# EAGLE board RedBot_Buzzer-Panel-v10 (EAGLE 6.5.0)
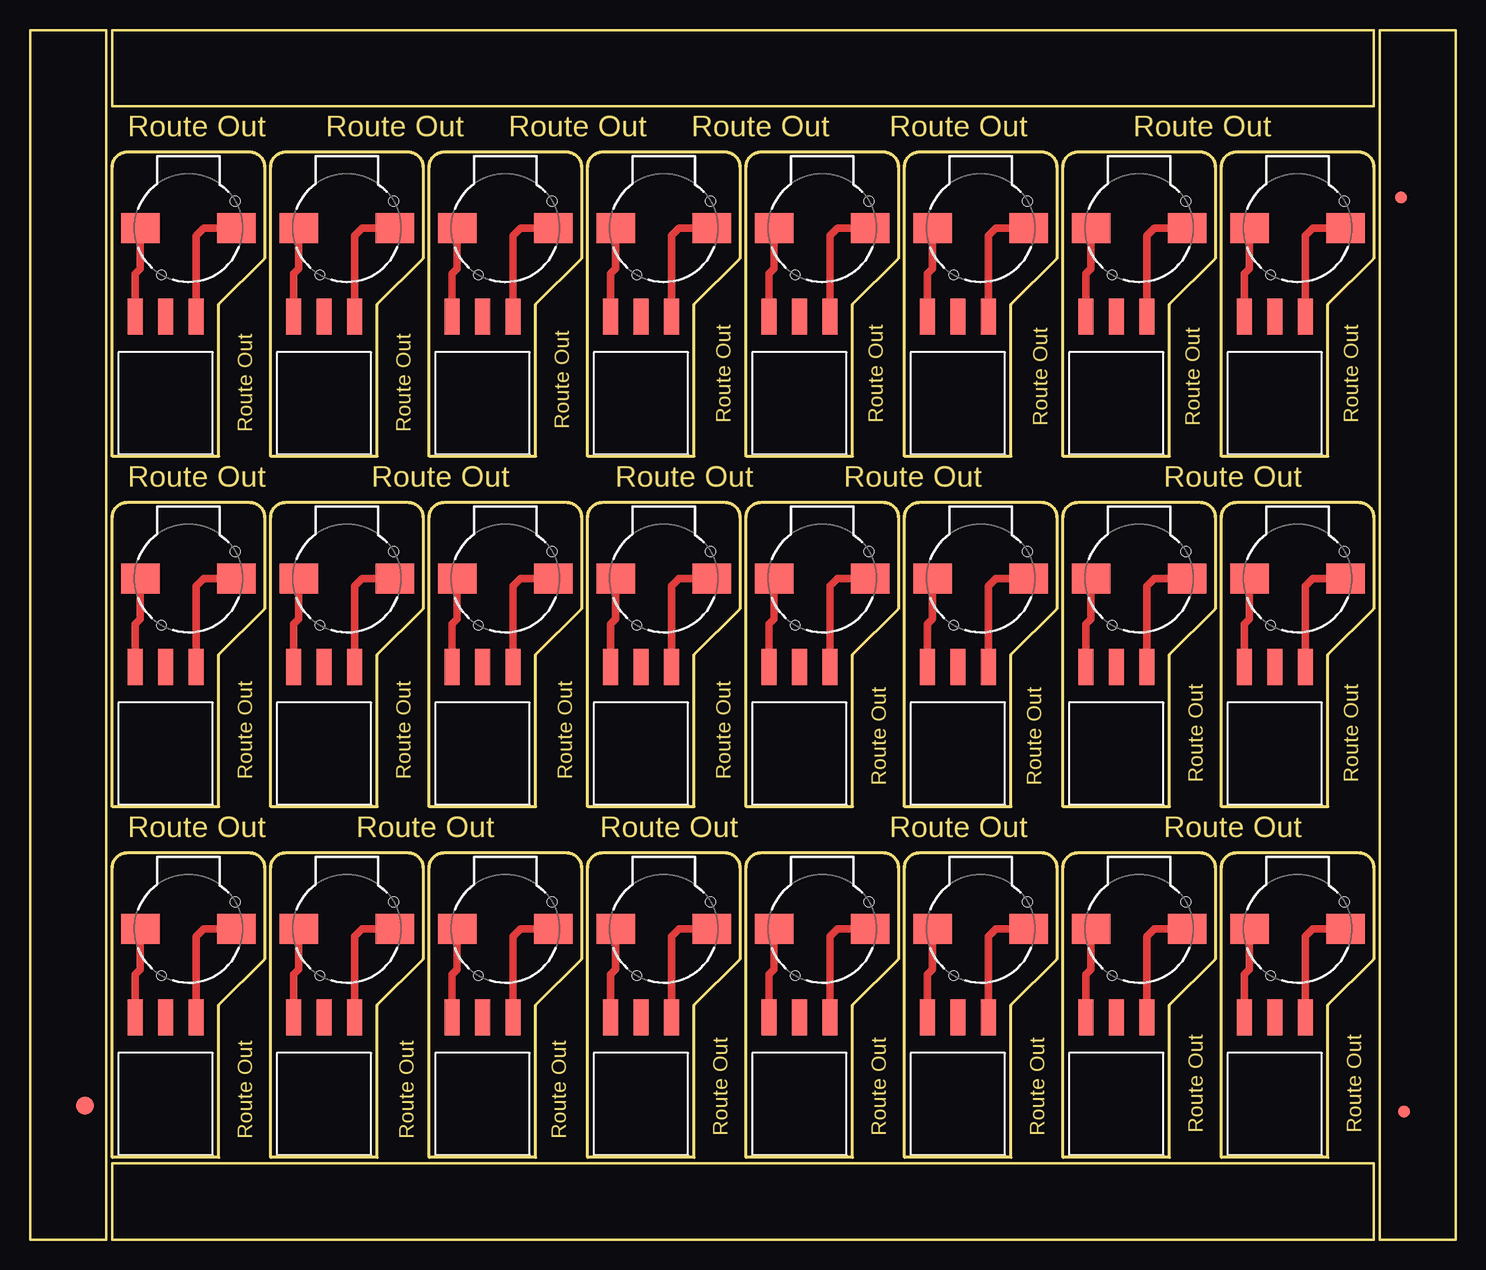
[diagram p0: board, top side]
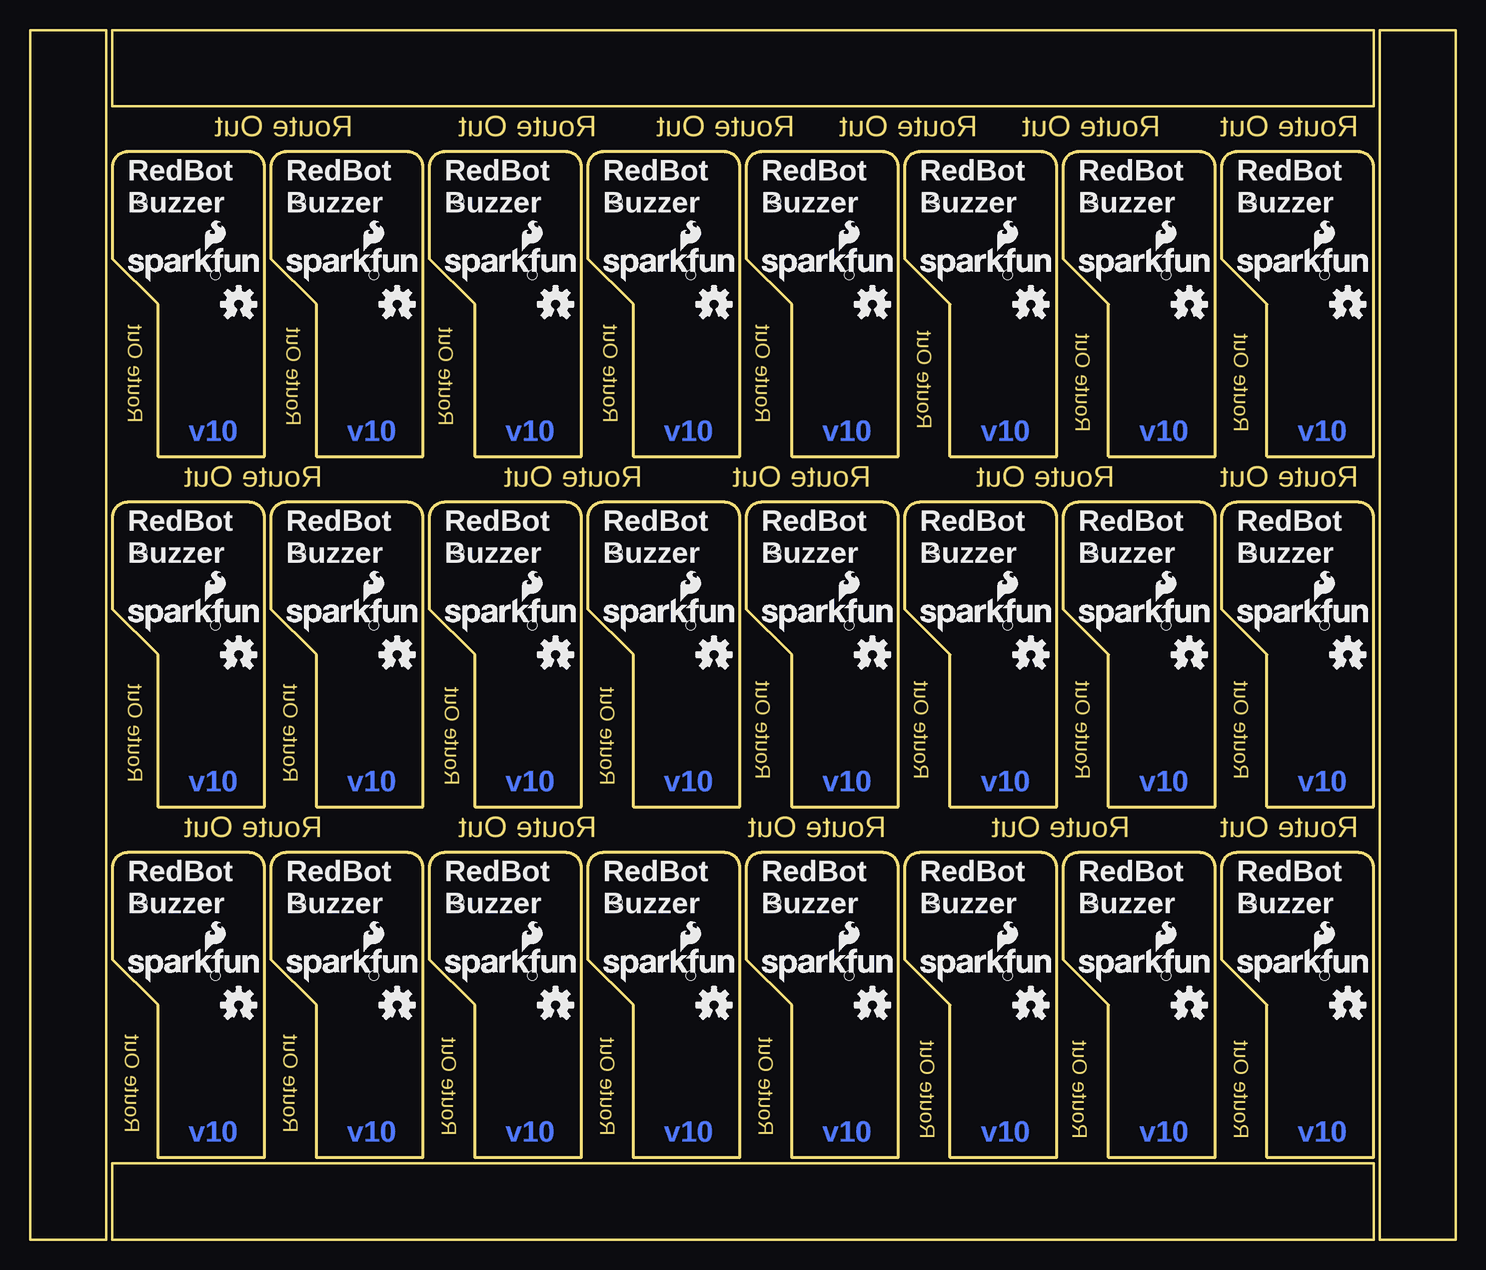
[diagram p1: board, bottom side, seen from below]

Size 118.87 x 100.84 mm. Coordinates in mm from the lower left corner, seen from the top.
Outline: 95.76,94.49 6.86,94.49 6.86,100.84 112.01,100.84 112.01,94.49 89.15,94.49
Outline: 29.72,6.35 6.86,6.35 6.86,0 112.01,0 112.01,6.35 23.11,6.35
Outline: 6.86,6.86 6.86,30.99 arc-90 8.13,32.26 18.29,32.26 arc-90 19.56,30.99 19.56,23.37 15.75,19.56 15.75,6.86 6.86,6.86
Outline: 20.07,6.86 20.07,30.99 arc-90 21.34,32.26 31.5,32.26 arc-90 32.77,30.99 32.77,23.37 28.96,19.56 28.96,6.86 20.07,6.86
Outline: 33.27,6.86 33.27,30.99 arc-90 34.54,32.26 44.7,32.26 arc-90 45.97,30.99 45.97,23.37 42.16,19.56 42.16,6.86 33.27,6.86
Outline: 46.48,6.86 46.48,30.99 arc-90 47.75,32.26 57.91,32.26 arc-90 59.18,30.99 59.18,23.37 55.37,19.56 55.37,6.86 46.48,6.86
Outline: 59.69,6.86 59.69,30.99 arc-90 60.96,32.26 71.12,32.26 arc-90 72.39,30.99 72.39,23.37 68.58,19.56 68.58,6.86 59.69,6.86
Outline: 72.9,6.86 72.9,30.99 arc-90 74.17,32.26 84.33,32.26 arc-90 85.6,30.99 85.6,23.37 81.79,19.56 81.79,6.86 72.9,6.86
Outline: 86.11,6.86 86.11,30.99 arc-90 87.38,32.26 97.54,32.26 arc-90 98.81,30.99 98.81,23.37 95,19.56 95,6.86 86.11,6.86
Outline: 99.31,6.86 99.31,30.99 arc-90 100.58,32.26 110.74,32.26 arc-90 112.01,30.99 112.01,23.37 108.2,19.56 108.2,6.86 99.31,6.86
Outline: 6.86,36.07 6.86,60.2 arc-90 8.13,61.47 18.29,61.47 arc-90 19.56,60.2 19.56,52.58 15.75,48.77 15.75,36.07 6.86,36.07
Outline: 20.07,36.07 20.07,60.2 arc-90 21.34,61.47 31.5,61.47 arc-90 32.77,60.2 32.77,52.58 28.96,48.77 28.96,36.07 20.07,36.07
Outline: 33.27,36.07 33.27,60.2 arc-90 34.54,61.47 44.7,61.47 arc-90 45.97,60.2 45.97,52.58 42.16,48.77 42.16,36.07 33.27,36.07
Outline: 46.48,36.07 46.48,60.2 arc-90 47.75,61.47 57.91,61.47 arc-90 59.18,60.2 59.18,52.58 55.37,48.77 55.37,36.07 46.48,36.07
Outline: 59.69,36.07 59.69,60.2 arc-90 60.96,61.47 71.12,61.47 arc-90 72.39,60.2 72.39,52.58 68.58,48.77 68.58,36.07 59.69,36.07
Outline: 72.9,36.07 72.9,60.2 arc-90 74.17,61.47 84.33,61.47 arc-90 85.6,60.2 85.6,52.58 81.79,48.77 81.79,36.07 72.9,36.07
Outline: 86.11,36.07 86.11,60.2 arc-90 87.38,61.47 97.54,61.47 arc-90 98.81,60.2 98.81,52.58 95,48.77 95,36.07 86.11,36.07
Outline: 99.31,36.07 99.31,60.2 arc-90 100.58,61.47 110.74,61.47 arc-90 112.01,60.2 112.01,52.58 108.2,48.77 108.2,36.07 99.31,36.07
Outline: 6.86,65.28 6.86,89.41 arc-90 8.13,90.68 18.29,90.68 arc-90 19.56,89.41 19.56,81.79 15.75,77.98 15.75,65.28 6.86,65.28
Outline: 20.07,65.28 20.07,89.41 arc-90 21.34,90.68 31.5,90.68 arc-90 32.77,89.41 32.77,81.79 28.96,77.98 28.96,65.28 20.07,65.28
Outline: 33.27,65.28 33.27,89.41 arc-90 34.54,90.68 44.7,90.68 arc-90 45.97,89.41 45.97,81.79 42.16,77.98 42.16,65.28 33.27,65.28
Outline: 46.48,65.28 46.48,89.41 arc-90 47.75,90.68 57.91,90.68 arc-90 59.18,89.41 59.18,81.79 55.37,77.98 55.37,65.28 46.48,65.28
Outline: 59.69,65.28 59.69,89.41 arc-90 60.96,90.68 71.12,90.68 arc-90 72.39,89.41 72.39,81.79 68.58,77.98 68.58,65.28 59.69,65.28
Outline: 72.9,65.28 72.9,89.41 arc-90 74.17,90.68 84.33,90.68 arc-90 85.6,89.41 85.6,81.79 81.79,77.98 81.79,65.28 72.9,65.28
Outline: 86.11,65.28 86.11,89.41 arc-90 87.38,90.68 97.54,90.68 arc-90 98.81,89.41 98.81,81.79 95,77.98 95,65.28 86.11,65.28
Outline: 99.31,65.28 99.31,89.41 arc-90 100.58,90.68 110.74,90.68 arc-90 112.01,89.41 112.01,81.79 108.2,77.98 108.2,65.28 99.31,65.28
Outline: 6.35,0 6.35,100.84 0,100.84 0,0 6.35,0
Outline: 118.87,0 118.87,100.84 112.52,100.84 112.52,0 118.87,0
Copper layers (1*16): Top 0.035mm / dielectric 1.5mm / Bottom 0.035mm
Design rules "SparkFun": minimum track width 8mil, minimum drill 20mil, track to track 8mil, track to pad 8mil, pad to pad 8mil, via to via 8mil, smd to smd 8mil, copper to edge 8mil, drill to drill 8mil, minimum pad ring 12mil, minimum via ring 10mil, stop-mask expansion 4mil, vias tented up to drill 20mil, thermal gap 10mil

## Footprints (pad centres in the part's own frame; a part is rotated, then mirrored left to right if it is on the bottom)
BUZZER-CCV = smd 3.2 x 2.5: + 4,0; - -4,0 | hole 0.8: -3.9,-2.25; 2.25,3.9
FIDUCIAL-1.5X3 = smd 1.5 x 1.5: 1 0,0
FIDUCIAL-1X2 = smd 1 x 1: 1 0,0
1X03_SMD_RA_FEMALE = smd 1.25 x 3: 1 -2.54,7.225; 2 0,7.225; 3 2.54,7.225

## Placement (x,y rotation side)
B1  Buzzer  [BUZZER-CCV]  13.21,25.91 180 top
B2  Buzzer  [BUZZER-CCV]  26.42,25.91 180 top
B3  Buzzer  [BUZZER-CCV]  39.62,25.91 180 top
B4  Buzzer  [BUZZER-CCV]  52.83,25.91 180 top
B5  Buzzer  [BUZZER-CCV]  66.04,25.91 180 top
B6  Buzzer  [BUZZER-CCV]  79.25,25.91 180 top
B7  Buzzer  [BUZZER-CCV]  92.46,25.91 180 top
B8  Buzzer  [BUZZER-CCV]  105.66,25.91 180 top
B9  Buzzer  [BUZZER-CCV]  13.21,55.12 180 top
B10  Buzzer  [BUZZER-CCV]  26.42,55.12 180 top
B11  Buzzer  [BUZZER-CCV]  39.62,55.12 180 top
B12  Buzzer  [BUZZER-CCV]  52.83,55.12 180 top
B13  Buzzer  [BUZZER-CCV]  66.04,55.12 180 top
B14  Buzzer  [BUZZER-CCV]  79.25,55.12 180 top
B15  Buzzer  [BUZZER-CCV]  92.46,55.12 180 top
B16  Buzzer  [BUZZER-CCV]  105.66,55.12 180 top
B17  Buzzer  [BUZZER-CCV]  13.21,84.33 180 top
B18  Buzzer  [BUZZER-CCV]  26.42,84.33 180 top
B19  Buzzer  [BUZZER-CCV]  39.62,84.33 180 top
B20  Buzzer  [BUZZER-CCV]  52.83,84.33 180 top
B21  Buzzer  [BUZZER-CCV]  66.04,84.33 180 top
B22  Buzzer  [BUZZER-CCV]  79.25,84.33 180 top
B23  Buzzer  [BUZZER-CCV]  92.46,84.33 180 top
B24  Buzzer  [BUZZER-CCV]  105.66,84.33 180 top
E$1  [FIDUCIAL-1.5X3]  4.57,11.18 0 top
E$4  [FIDUCIAL-1X2]  114.55,10.67 0 top
E$5  [FIDUCIAL-1X2]  114.3,86.87 180 top
JP1  1x3 RA Female .1"  [1X03_SMD_RA_FEMALE]  11.3,11.3 0 top
JP2  1x3 RA Female .1"  [1X03_SMD_RA_FEMALE]  24.51,11.3 0 top
JP3  1x3 RA Female .1"  [1X03_SMD_RA_FEMALE]  37.72,11.3 0 top
JP4  1x3 RA Female .1"  [1X03_SMD_RA_FEMALE]  50.93,11.3 0 top
JP5  1x3 RA Female .1"  [1X03_SMD_RA_FEMALE]  64.14,11.3 0 top
JP6  1x3 RA Female .1"  [1X03_SMD_RA_FEMALE]  77.34,11.3 0 top
JP7  1x3 RA Female .1"  [1X03_SMD_RA_FEMALE]  90.55,11.3 0 top
JP8  1x3 RA Female .1"  [1X03_SMD_RA_FEMALE]  103.76,11.3 0 top
JP9  1x3 RA Female .1"  [1X03_SMD_RA_FEMALE]  11.3,40.51 0 top
JP10  1x3 RA Female .1"  [1X03_SMD_RA_FEMALE]  24.51,40.51 0 top
JP11  1x3 RA Female .1"  [1X03_SMD_RA_FEMALE]  37.72,40.51 0 top
JP12  1x3 RA Female .1"  [1X03_SMD_RA_FEMALE]  50.93,40.51 0 top
JP13  1x3 RA Female .1"  [1X03_SMD_RA_FEMALE]  64.14,40.51 0 top
JP14  1x3 RA Female .1"  [1X03_SMD_RA_FEMALE]  77.34,40.51 0 top
JP15  1x3 RA Female .1"  [1X03_SMD_RA_FEMALE]  90.55,40.51 0 top
JP16  1x3 RA Female .1"  [1X03_SMD_RA_FEMALE]  103.76,40.51 0 top
JP17  1x3 RA Female .1"  [1X03_SMD_RA_FEMALE]  11.3,69.72 0 top
JP18  1x3 RA Female .1"  [1X03_SMD_RA_FEMALE]  24.51,69.72 0 top
JP19  1x3 RA Female .1"  [1X03_SMD_RA_FEMALE]  37.72,69.72 0 top
JP20  1x3 RA Female .1"  [1X03_SMD_RA_FEMALE]  50.93,69.72 0 top
JP21  1x3 RA Female .1"  [1X03_SMD_RA_FEMALE]  64.14,69.72 0 top
JP22  1x3 RA Female .1"  [1X03_SMD_RA_FEMALE]  77.34,69.72 0 top
JP23  1x3 RA Female .1"  [1X03_SMD_RA_FEMALE]  90.55,69.72 0 top
JP24  1x3 RA Female .1"  [1X03_SMD_RA_FEMALE]  103.76,69.72 0 top
LOGO1  OSHW-LOGOS  [OSHW-LOGO-S]  9.02,19.56 0 bottom
LOGO2  SFE_LOGO_NAME_FLAME.1_INCH  [SFE_LOGO_NAME_FLAME_.1]  18.67,21.34 0 bottom
LOGO3  OSHW-LOGOS  [OSHW-LOGO-S]  22.23,19.56 0 bottom
LOGO4  SFE_LOGO_NAME_FLAME.1_INCH  [SFE_LOGO_NAME_FLAME_.1]  31.88,21.34 0 bottom
LOGO5  OSHW-LOGOS  [OSHW-LOGO-S]  35.43,19.56 0 bottom
LOGO6  SFE_LOGO_NAME_FLAME.1_INCH  [SFE_LOGO_NAME_FLAME_.1]  45.09,21.34 0 bottom
LOGO7  OSHW-LOGOS  [OSHW-LOGO-S]  48.64,19.56 0 bottom
LOGO8  SFE_LOGO_NAME_FLAME.1_INCH  [SFE_LOGO_NAME_FLAME_.1]  58.29,21.34 0 bottom
LOGO9  OSHW-LOGOS  [OSHW-LOGO-S]  61.85,19.56 0 bottom
LOGO10  SFE_LOGO_NAME_FLAME.1_INCH  [SFE_LOGO_NAME_FLAME_.1]  71.5,21.34 0 bottom
LOGO11  OSHW-LOGOS  [OSHW-LOGO-S]  75.06,19.56 0 bottom
LOGO12  SFE_LOGO_NAME_FLAME.1_INCH  [SFE_LOGO_NAME_FLAME_.1]  84.71,21.34 0 bottom
LOGO13  OSHW-LOGOS  [OSHW-LOGO-S]  88.27,19.56 0 bottom
LOGO14  SFE_LOGO_NAME_FLAME.1_INCH  [SFE_LOGO_NAME_FLAME_.1]  97.92,21.34 0 bottom
LOGO15  OSHW-LOGOS  [OSHW-LOGO-S]  101.47,19.56 0 bottom
LOGO16  SFE_LOGO_NAME_FLAME.1_INCH  [SFE_LOGO_NAME_FLAME_.1]  111.12,21.34 0 bottom
LOGO17  OSHW-LOGOS  [OSHW-LOGO-S]  9.02,48.77 0 bottom
LOGO18  SFE_LOGO_NAME_FLAME.1_INCH  [SFE_LOGO_NAME_FLAME_.1]  18.67,50.55 0 bottom
LOGO19  OSHW-LOGOS  [OSHW-LOGO-S]  22.23,48.77 0 bottom
LOGO20  SFE_LOGO_NAME_FLAME.1_INCH  [SFE_LOGO_NAME_FLAME_.1]  31.88,50.55 0 bottom
LOGO21  OSHW-LOGOS  [OSHW-LOGO-S]  35.43,48.77 0 bottom
LOGO22  SFE_LOGO_NAME_FLAME.1_INCH  [SFE_LOGO_NAME_FLAME_.1]  45.09,50.55 0 bottom
LOGO23  OSHW-LOGOS  [OSHW-LOGO-S]  48.64,48.77 0 bottom
LOGO24  SFE_LOGO_NAME_FLAME.1_INCH  [SFE_LOGO_NAME_FLAME_.1]  58.29,50.55 0 bottom
LOGO25  OSHW-LOGOS  [OSHW-LOGO-S]  61.85,48.77 0 bottom
LOGO26  SFE_LOGO_NAME_FLAME.1_INCH  [SFE_LOGO_NAME_FLAME_.1]  71.5,50.55 0 bottom
LOGO27  OSHW-LOGOS  [OSHW-LOGO-S]  75.06,48.77 0 bottom
LOGO28  SFE_LOGO_NAME_FLAME.1_INCH  [SFE_LOGO_NAME_FLAME_.1]  84.71,50.55 0 bottom
LOGO29  OSHW-LOGOS  [OSHW-LOGO-S]  88.27,48.77 0 bottom
LOGO30  SFE_LOGO_NAME_FLAME.1_INCH  [SFE_LOGO_NAME_FLAME_.1]  97.92,50.55 0 bottom
LOGO31  OSHW-LOGOS  [OSHW-LOGO-S]  101.47,48.77 0 bottom
LOGO32  SFE_LOGO_NAME_FLAME.1_INCH  [SFE_LOGO_NAME_FLAME_.1]  111.12,50.55 0 bottom
LOGO33  OSHW-LOGOS  [OSHW-LOGO-S]  9.02,77.98 0 bottom
LOGO34  SFE_LOGO_NAME_FLAME.1_INCH  [SFE_LOGO_NAME_FLAME_.1]  18.67,79.76 0 bottom
LOGO35  OSHW-LOGOS  [OSHW-LOGO-S]  22.23,77.98 0 bottom
LOGO36  SFE_LOGO_NAME_FLAME.1_INCH  [SFE_LOGO_NAME_FLAME_.1]  31.88,79.76 0 bottom
LOGO37  OSHW-LOGOS  [OSHW-LOGO-S]  35.43,77.98 0 bottom
LOGO38  SFE_LOGO_NAME_FLAME.1_INCH  [SFE_LOGO_NAME_FLAME_.1]  45.09,79.76 0 bottom
LOGO39  OSHW-LOGOS  [OSHW-LOGO-S]  48.64,77.98 0 bottom
LOGO40  SFE_LOGO_NAME_FLAME.1_INCH  [SFE_LOGO_NAME_FLAME_.1]  58.29,79.76 0 bottom
LOGO41  OSHW-LOGOS  [OSHW-LOGO-S]  61.85,77.98 0 bottom
LOGO42  SFE_LOGO_NAME_FLAME.1_INCH  [SFE_LOGO_NAME_FLAME_.1]  71.5,79.76 0 bottom
LOGO43  OSHW-LOGOS  [OSHW-LOGO-S]  75.06,77.98 0 bottom
LOGO44  SFE_LOGO_NAME_FLAME.1_INCH  [SFE_LOGO_NAME_FLAME_.1]  84.71,79.76 0 bottom
LOGO45  OSHW-LOGOS  [OSHW-LOGO-S]  88.27,77.98 0 bottom
LOGO46  SFE_LOGO_NAME_FLAME.1_INCH  [SFE_LOGO_NAME_FLAME_.1]  97.92,79.76 0 bottom
LOGO47  OSHW-LOGOS  [OSHW-LOGO-S]  101.47,77.98 0 bottom
LOGO48  SFE_LOGO_NAME_FLAME.1_INCH  [SFE_LOGO_NAME_FLAME_.1]  111.12,79.76 0 bottom

## Library data of the parts
B1-B24 = SparkFun
E$1 E$4 E$5 LOGO1-LOGO48 = SparkFun-Aesthetics
JP1-JP24 = SparkFun-Connectors; PROD_ID: CONN-10926

## Nets
N$1: B1.+ JP1.1
N$2: B1.- JP1.3
N$3: B2.- JP2.3
N$4: B2.+ JP2.1
N$5: B3.- JP3.3
N$6: B3.+ JP3.1
N$7: B4.- JP4.3
N$8: B4.+ JP4.1
N$9: B5.- JP5.3
N$10: B5.+ JP5.1
N$11: B6.- JP6.3
N$12: B6.+ JP6.1
N$13: B7.- JP7.3
N$14: B7.+ JP7.1
N$15: B8.- JP8.3
N$16: B8.+ JP8.1
N$17: B9.- JP9.3
N$18: B9.+ JP9.1
N$19: B10.- JP10.3
N$20: B10.+ JP10.1
N$21: B11.- JP11.3
N$22: B11.+ JP11.1
N$23: B12.- JP12.3
N$24: B12.+ JP12.1
N$25: B13.- JP13.3
N$26: B13.+ JP13.1
N$27: B14.- JP14.3
N$28: B14.+ JP14.1
N$29: B15.- JP15.3
N$30: B15.+ JP15.1
N$31: B16.- JP16.3
N$32: B16.+ JP16.1
N$33: B17.- JP17.3
N$34: B17.+ JP17.1
N$35: B18.- JP18.3
N$36: B18.+ JP18.1
N$37: B19.- JP19.3
N$38: B19.+ JP19.1
N$39: B20.- JP20.3
N$40: B20.+ JP20.1
N$41: B21.- JP21.3
N$42: B21.+ JP21.1
N$43: B22.- JP22.3
N$44: B22.+ JP22.1
N$45: B23.- JP23.3
N$46: B23.+ JP23.1
N$47: B24.- JP24.3
N$48: B24.+ JP24.1

## Tracks (layer width: path | path; a pad name or v marks a point on that pad's centre or on a via)
N$1
  Top 0.61: B1.+ 9.21,22.54 8.76,22.1 JP1.1
N$2
  Top 0.61: JP1.3 13.84,25.27 14.48,25.91 B1.-
N$3
  Top 0.61: JP2.3 27.05,25.27 27.69,25.91 B2.-
N$4
  Top 0.61: B2.+ 22.42,22.54 21.97,22.1 JP2.1
N$5
  Top 0.61: JP3.3 40.26,25.27 40.89,25.91 B3.-
N$6
  Top 0.61: B3.+ 35.62,22.54 35.18,22.1 JP3.1
N$7
  Top 0.61: JP4.3 53.47,25.27 54.1,25.91 B4.-
N$8
  Top 0.61: B4.+ 48.83,22.54 48.39,22.1 JP4.1
N$9
  Top 0.61: JP5.3 66.67,25.27 67.31,25.91 B5.-
N$10
  Top 0.61: B5.+ 62.04,22.54 61.59,22.1 JP5.1
N$11
  Top 0.61: JP6.3 79.88,25.27 80.52,25.91 B6.-
N$12
  Top 0.61: B6.+ 75.25,22.54 74.8,22.1 JP6.1
N$13
  Top 0.61: JP7.3 93.09,25.27 93.73,25.91 B7.-
N$14
  Top 0.61: B7.+ 88.46,22.54 88.01,22.1 JP7.1
N$15
  Top 0.61: JP8.3 106.3,25.27 106.93,25.91 B8.-
N$16
  Top 0.61: B8.+ 101.66,22.54 101.22,22.1 JP8.1
N$17
  Top 0.61: JP9.3 13.84,54.48 14.48,55.12 B9.-
N$18
  Top 0.61: B9.+ 9.21,51.75 8.76,51.31 JP9.1
N$19
  Top 0.61: JP10.3 27.05,54.48 27.69,55.12 B10.-
N$20
  Top 0.61: B10.+ 22.42,51.75 21.97,51.31 JP10.1
N$21
  Top 0.61: JP11.3 40.26,54.48 40.89,55.12 B11.-
N$22
  Top 0.61: B11.+ 35.62,51.75 35.18,51.31 JP11.1
N$23
  Top 0.61: JP12.3 53.47,54.48 54.1,55.12 B12.-
N$24
  Top 0.61: B12.+ 48.83,51.75 48.39,51.31 JP12.1
N$25
  Top 0.61: JP13.3 66.67,54.48 67.31,55.12 B13.-
N$26
  Top 0.61: B13.+ 62.04,51.75 61.59,51.31 JP13.1
N$27
  Top 0.61: JP14.3 79.88,54.48 80.52,55.12 B14.-
N$28
  Top 0.61: B14.+ 75.25,51.75 74.8,51.31 JP14.1
N$29
  Top 0.61: JP15.3 93.09,54.48 93.73,55.12 B15.-
N$30
  Top 0.61: B15.+ 88.46,51.75 88.01,51.31 JP15.1
N$31
  Top 0.61: JP16.3 106.3,54.48 106.93,55.12 B16.-
N$32
  Top 0.61: B16.+ 101.66,51.75 101.22,51.31 JP16.1
N$33
  Top 0.61: JP17.3 13.84,83.69 14.48,84.33 B17.-
N$34
  Top 0.61: B17.+ 9.21,80.96 8.76,80.52 JP17.1
N$35
  Top 0.61: JP18.3 27.05,83.69 27.69,84.33 B18.-
N$36
  Top 0.61: B18.+ 22.42,80.96 21.97,80.52 JP18.1
N$37
  Top 0.61: JP19.3 40.26,83.69 40.89,84.33 B19.-
N$38
  Top 0.61: B19.+ 35.62,80.96 35.18,80.52 JP19.1
N$39
  Top 0.61: JP20.3 53.47,83.69 54.1,84.33 B20.-
N$40
  Top 0.61: B20.+ 48.83,80.96 48.39,80.52 JP20.1
N$41
  Top 0.61: JP21.3 66.67,83.69 67.31,84.33 B21.-
N$42
  Top 0.61: B21.+ 62.04,80.96 61.59,80.52 JP21.1
N$43
  Top 0.61: JP22.3 79.88,83.69 80.52,84.33 B22.-
N$44
  Top 0.61: B22.+ 75.25,80.96 74.8,80.52 JP22.1
N$45
  Top 0.61: JP23.3 93.09,83.69 93.73,84.33 B23.-
N$46
  Top 0.61: B23.+ 88.46,80.96 88.01,80.52 JP23.1
N$47
  Top 0.61: JP24.3 106.3,83.69 106.93,84.33 B24.-
N$48
  Top 0.61: B24.+ 101.66,80.96 101.22,80.52 JP24.1

## Text on the board
Bottom: v10 | v10 | v10 | v10 | v10 | v10 | v10 | v10 | v10 | v10 | v10 | v10 | v10 | v10 | v10 | v10 | v10 | v10 | v10 | v10 | v10 | v10 | v10 | v10
Dimension: Route Out | Route Out | Route Out | Route Out | Route Out | Route Out | Route Out | Route Out | Route Out | Route Out | Route Out | Route Out | Route Out | Route Out | Route Out | Route Out | Route Out | Route Out | Route Out | Route Out | Route Out | Route Out | Route Out | Route Out | Route Out | Route Out | Route Out | Route Out | Route Out | Route Out | Route Out | Route Out | Route Out | Route Out | Route Out | Route Out | Route Out | Route Out | Route Out | Route Out
bPlace: RedBot / Buzzer | RedBot / Buzzer | RedBot / Buzzer | RedBot / Buzzer | RedBot / Buzzer | RedBot / Buzzer | RedBot / Buzzer | RedBot / Buzzer | RedBot / Buzzer | RedBot / Buzzer | RedBot / Buzzer | RedBot / Buzzer | RedBot / Buzzer | RedBot / Buzzer | RedBot / Buzzer | RedBot / Buzzer | RedBot / Buzzer | RedBot / Buzzer | RedBot / Buzzer | RedBot / Buzzer | RedBot / Buzzer | RedBot / Buzzer | RedBot / Buzzer | RedBot / Buzzer